# Altium PCB Mis - Voltage Regulators 500m SMD.PcbDoc
Units mm, origin at the board's own origin, x right, y up, seen from the top; angles counter-clockwise.
Board outline 36.25 x 25.45 mm, 2 copper layers (Top Layer, Bottom Layer); 16 components, 4 nets, 33 pads, 0 vias.
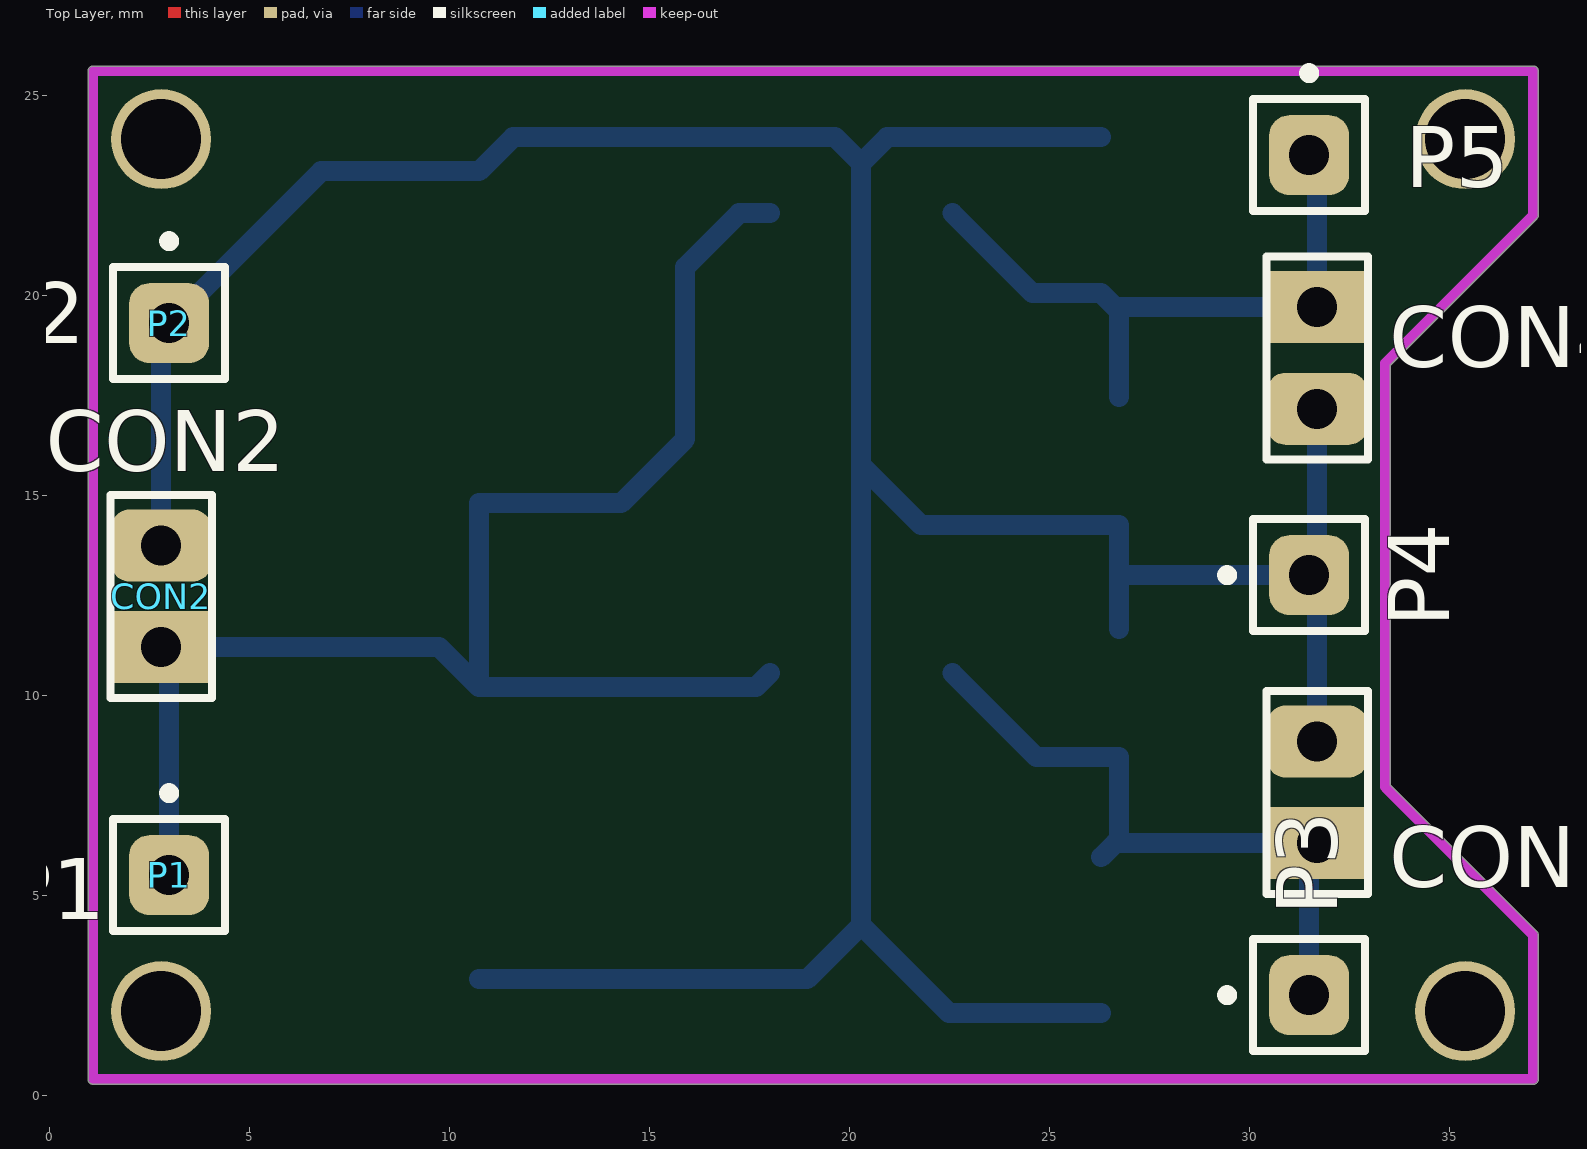
[diagram p0: Top Layer view]
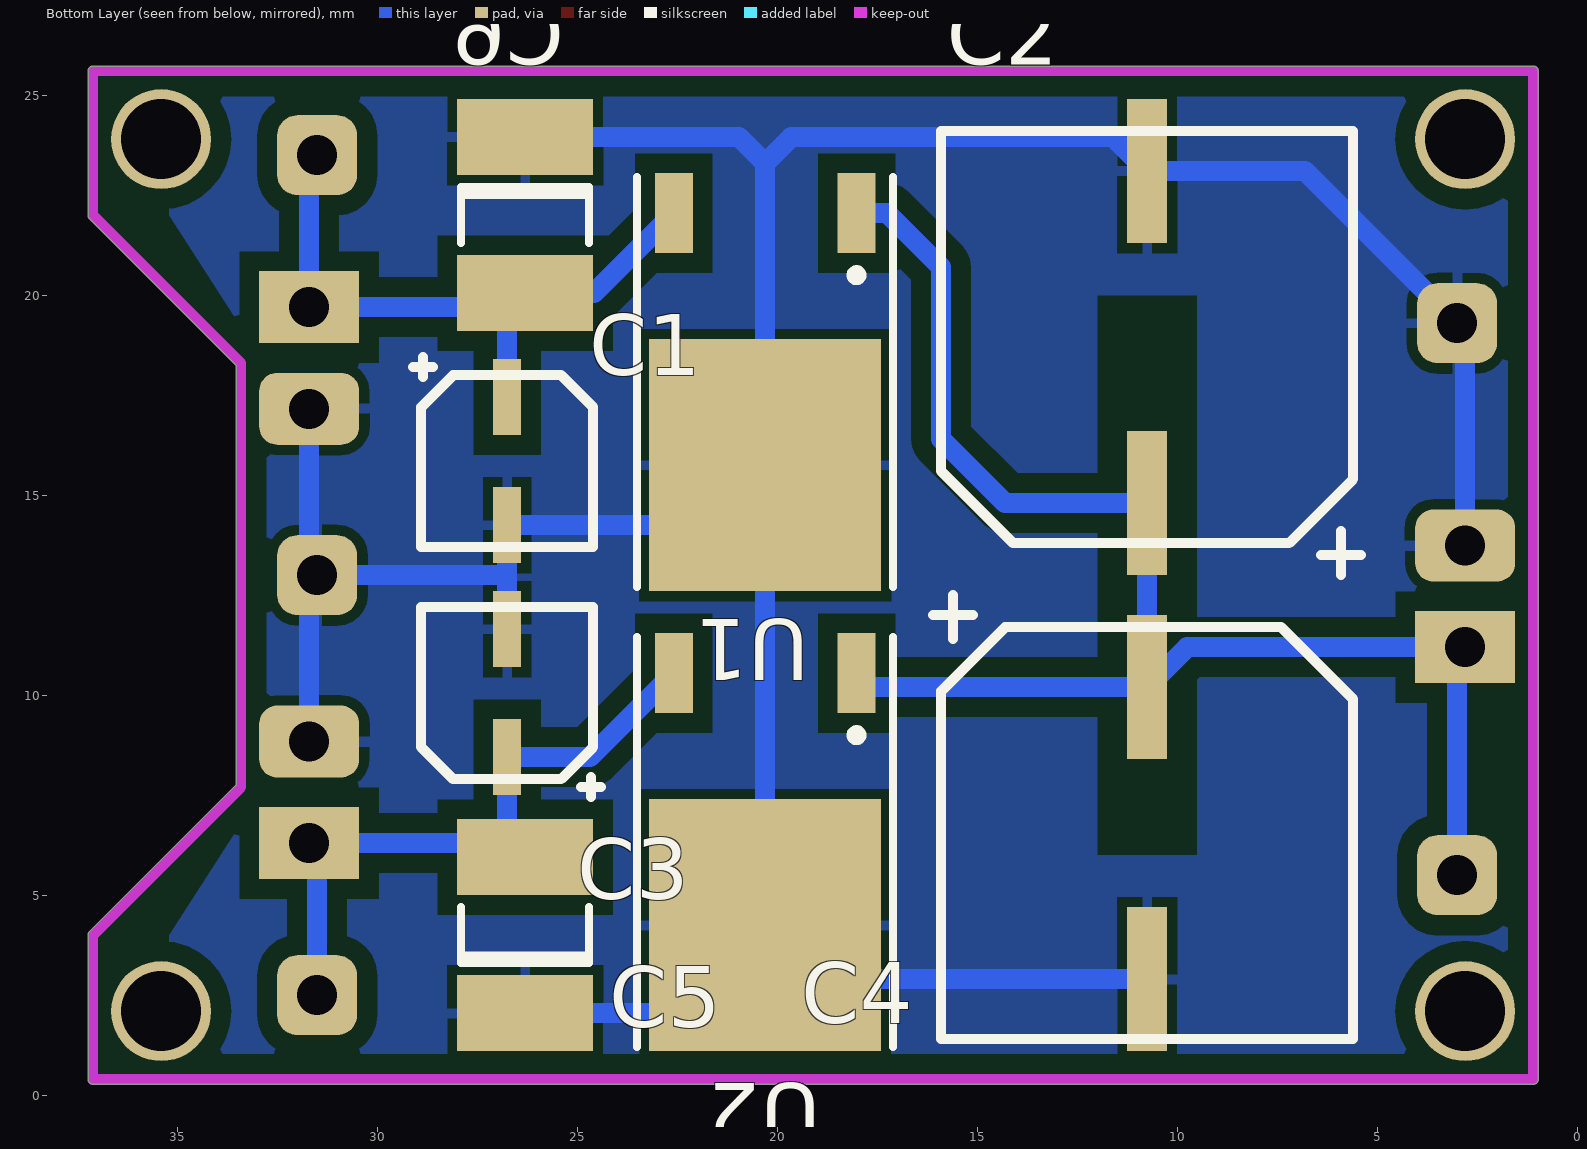
[diagram p1: Bottom Layer view, seen from below]

## Layer stack, top to bottom
Top Layer: signal copper 0.0356
Dielectric: dielectric 0.32, FR-4, Dk 4.8
Bottom Layer: signal copper 0.0356

## Board outline
0.973,0.4 0.973,25.6 cw(c1.1,25.6) 1.1,25.727 37.1,25.727 cw(c37.1,25.6) 37.227,25.6 37.227,22 cw(c37.1,22) 37.19,21.909 37.19,21.91 33.527,18.247 33.527,7.753 37.19,4.09 cw(c37.1,4) 37.227,4 37.227,0.4 cw(c37.1,0.4) 37.1,0.273 1.1,0.273 cw(c1.1,0.4)

## Design rules (kind name [scope] priority, off if disabled: settings)
Clearance [All] p1: gap=0.3
PolygonConnect [All] p1: connectstyle=Relief reliefconductorwidth=0.254 reliefentries=4 polygonreliefangle="90 Angle" airgapwidth=0.254
RoutingVias [All] p1: holewidth=0.711 width=1.27 viastyle="Through Hole" minholewidth=0.711 minwidth=1.27 maxholewidth=0.711 maxwidth=1.27
SolderMaskExpansion [All] p1: expansion=0.102
Width [All] p1: maxlimit=5 minlimit=0.4 preferedwidth=0.5 minimp=50.000000 maximp=50.000000 favimp=50.000000
28 further rules are at their usual default settings.

## Classes and differential pairs
component class "Mis - Voltage Regulators 500m SMD": C1 C2 C3 C4 C5 C6 CON2 CON3 CON4 P1 P2 P3 P4 U1 U2

## Components (designator, comment, footprint, x,y, rotation, side; value= is the part's Value field where it differs from the comment)
C1 "Cap Pol2" C-4x4 24.6,13.7 r90 bottom
C2 "Cap Pol2" C-10x10#1 15.9,24.1 r270 bottom
C3 "Cap Pol2" C-4x4 28.9,12.2 r270 bottom
C4 "Cap Pol2" C-10x10#2 5.6,1.4 r90 bottom
C5 "Cap" 4532[1812] 26.3,4 r90 bottom
C6 "Cap" 4532[1812] 26.3,22 r270 bottom
CON2 "Header 2" HDR1X2 2.8,11.2 r90 top
CON3 "Header 2" HDR1X2 31.7,6.3 r90 top
CON4 "Header 2" HDR1X2 31.7,19.7 r270 top
P1 "Plug" PIN1 3,5.5 r0 top
P2 "Plug" PIN1 3,19.3 r0 top
P3 "Plug" PIN1 31.5,2.5 r90 top
P4 "Plug" PIN1 31.5,13 r90 top
P5 "Plug" PIN1 31.5,23.5 r0 top
U1 "µA78M33CKVURG3" KTP02 20.3,18.9 r0 bottom
U2 "µA78M05CKTPR" KTP02 20.3,7.4 r0 bottom

## Footprints (in the part's own frame and the unit in brackets; to place one, negate y for a bottom-side part, rotate by r counter-clockwise, add the part's x,y. Pads: shape width x height; smd on the part's side, far side on the other; paste and mask are expansions set on the pad)
4532[1812] [mm] "Chip Capacitor; Body 4.5 x 3.2 mm (LxW typ)"
  rect 1.9x3.4 smd: 1(-1.95,0) 2(1.95,0)
  silkscreen extent -0.7,-1.6 0.7,1.6
C-4x4 [mm] "SMD Polar Aluminium Capacitor, 4x4mm, 10V"
  rect 1.9x0.7 smd: 1(3.75,2.15) 2(0.55,2.15)
  silkscreen extent 0,0 4.75,4.5, body extent 0,0 4.3,4.3, height 5.4
C-10x10#1 [mm] "SMD Polar Aluminium Capacitor, 10x10mm, 10V"
  rect 3.6x1 smd: 1(9.3,5.15) 2(1,5.15)
  silkscreen extent 0,0 11.1,10.5, body extent 0,0 10.3,10.3, height 10.3
C-10x10#2 [mm] "SMD Polar Aluminium Capacitor, 10x10mm, 10V"
  rect 3.6x1 smd: 1(8.8,5.15) 2(1.5,5.15)
  silkscreen extent 0,0 11.1,10.5, body extent 0,0 10.3,10.3, height 10.3
HDR1X2 [mm] "Connector; Header; 2 Position"
  rect 1.8x2.5 hole 1: 1(0,0)
  rrect50% 1.8x2.5 hole 1: 2(2.54,0)
  silkscreen extent -1.27,-1.27 3.81,1.27
KTP02 [mm] "PowerFLEX (D-PAK/TO-252-AA); 3 Leads (1 Cropped); Body 9.7 (inc. leads) x 6.2 mm (LxW max)"
  rect 0.95x2 smd: 1(-2.285,-3.15) 3(2.285,-3.15)
  rect 5.8x6.3 smd: 4(0,3.15)
  silkscreen extent -3.2,-4.05 3.2,6.2
PIN1 [mm] "Connector; Plug"
  rrect50% 2x2 hole 1: 1(0,0)
  silkscreen extent -1.4,-1.4 1.4,2.17

## Part data
C1 C2 C3 C4: "Polarized Capacitor (Axial)"
C5 C6: "Capacitor"
CON2 CON3 CON4: "Header, 2-Pin"
U1 U2: "Positive-Voltage Regulator"

## Free pads (board coordinates)
  round 2.5 hole 2: 0(2.8,2.1) 0(2.8,23.9) 0(35.4,2.1) 0(35.4,23.9)

## Nets (pads, with @x,y where several pads share a name; then routed paths per layer and width w, separated by ;. In a path a pad name is that pad's centre, name@x,y a point inside that pad or via, vN(x,y) a via of type N, cw(c..) or ccw(c..) an arc to the next point about the centre after c; other vN are vias at no path point)
3.3V: C1.1 C6.2 CON4.1 P5.1 U1.3 | length 16.3
  Bottom Layer w0.5: U1.3 24.585,20.05 C6.2 C6.2@26.65,19.7 ; C1.1 26.75,19.6 C6.2@26.65,19.7 ; P5.1 31.7,23.3 CON4.1 C6.2@26.65,19.7
5V: C3.1 C5.2 CON3.1 P3.1 U2.3 | length 16.7
  Bottom Layer w0.5: U2.3 24.685,8.45 C3.1 26.75,6.4 C5.2@26.65,6.3 ; C5.2 C5.2@26.65,6.3 ; P3.1 31.5,6.1 CON3.1 C5.2@26.65,6.3
GND: C1.2 C2.2 C3.2 C4.2 C5.1 C6.1 CON2.2 CON3.2 CON4.2 P2.1 P4.1 U1.4 U2.4 | length 90.4
  Bottom Layer w0.5: CON2.2 2.8,19.1 P2.1 6.8,23.1 C2.2 11.6,23.95 19.65,23.95 20.3,23.3 ; C4.2 18.95,2.9 U2.4 ; C5.1 22.5,2.05 U2.4 ; C6.1 20.95,23.95 20.3,23.3 ; C3.2 26.75,13 ; CON3.2 31.7,12.8 P4.1 ; CON4.2 31.7,13.2 P4.1 ; U2.4 U1.4 ; U1.4 21.8,14.25 C1.2 26.75,13 ; U1.4 20.3,23.3 ; 26.75,13 P4.1
VDD: C2.1 C4.1 CON2.1 P1.1 U1.1 U2.1 | length 38.7
  Bottom Layer w0.5: CON2.1 9.75,11.2 C4.1 ; P1.1 CON2.1@3,11 ; U2.1 17.665,10.2 C4.1 ; U1.1 17.25,22.05 15.9,20.7 15.9,16.4 14.3,14.8 C2.1 C4.1

## Polygon pours and split planes (outlines as drawn)
GND on Bottom Layer "Bottom Layer-No Net" (solid, pour order 6): 12,25.6 12,20 9.5,20 9.5,6 12,6 12,0.4 1.1,0.4 1.1,25.6
GND on Bottom Layer "Bottom Layer-No Net" (solid, pour order 4): 12,25.6 35.2,25.6 35.2,22 32.816,18.3 32.816,18.1 32.816,7.7 35.2,4 35.2,0.4 12,0.4

## Keep-outs
Keep-Out Layer:
  lines w0.254: 1.1,0.4 37.1,0.4 37.1,4 33.4,7.7 33.4,18.3 37.1,22 37.1,25.6 1.1,25.6 1.1,0.4

## Dimensions
37.1,0.4 to 1.1,0.4 on Top Overlay
37.5,0.4 to 37.5,25.6 on Top Overlay